# Altium PCB uTCA_MCH_PCB3.pcbdoc (part 7 of 8)
Units mm, origin at the board's own origin, x right, y up, seen from the top; angles counter-clockwise.
Board outline 182.75 x 75.8 mm, 10 copper layers (Top Layer, GND1, MidLayer1, PWR1, Mid-Layer 2, GND2, PWR2, Mid-Layer 3, GND3, Bottom Layer), stack 1.568 mm thick; 778 components, 977 nets, 4756 pads, 1214 vias.
Unrouted connection lines stored in the file: 1790.
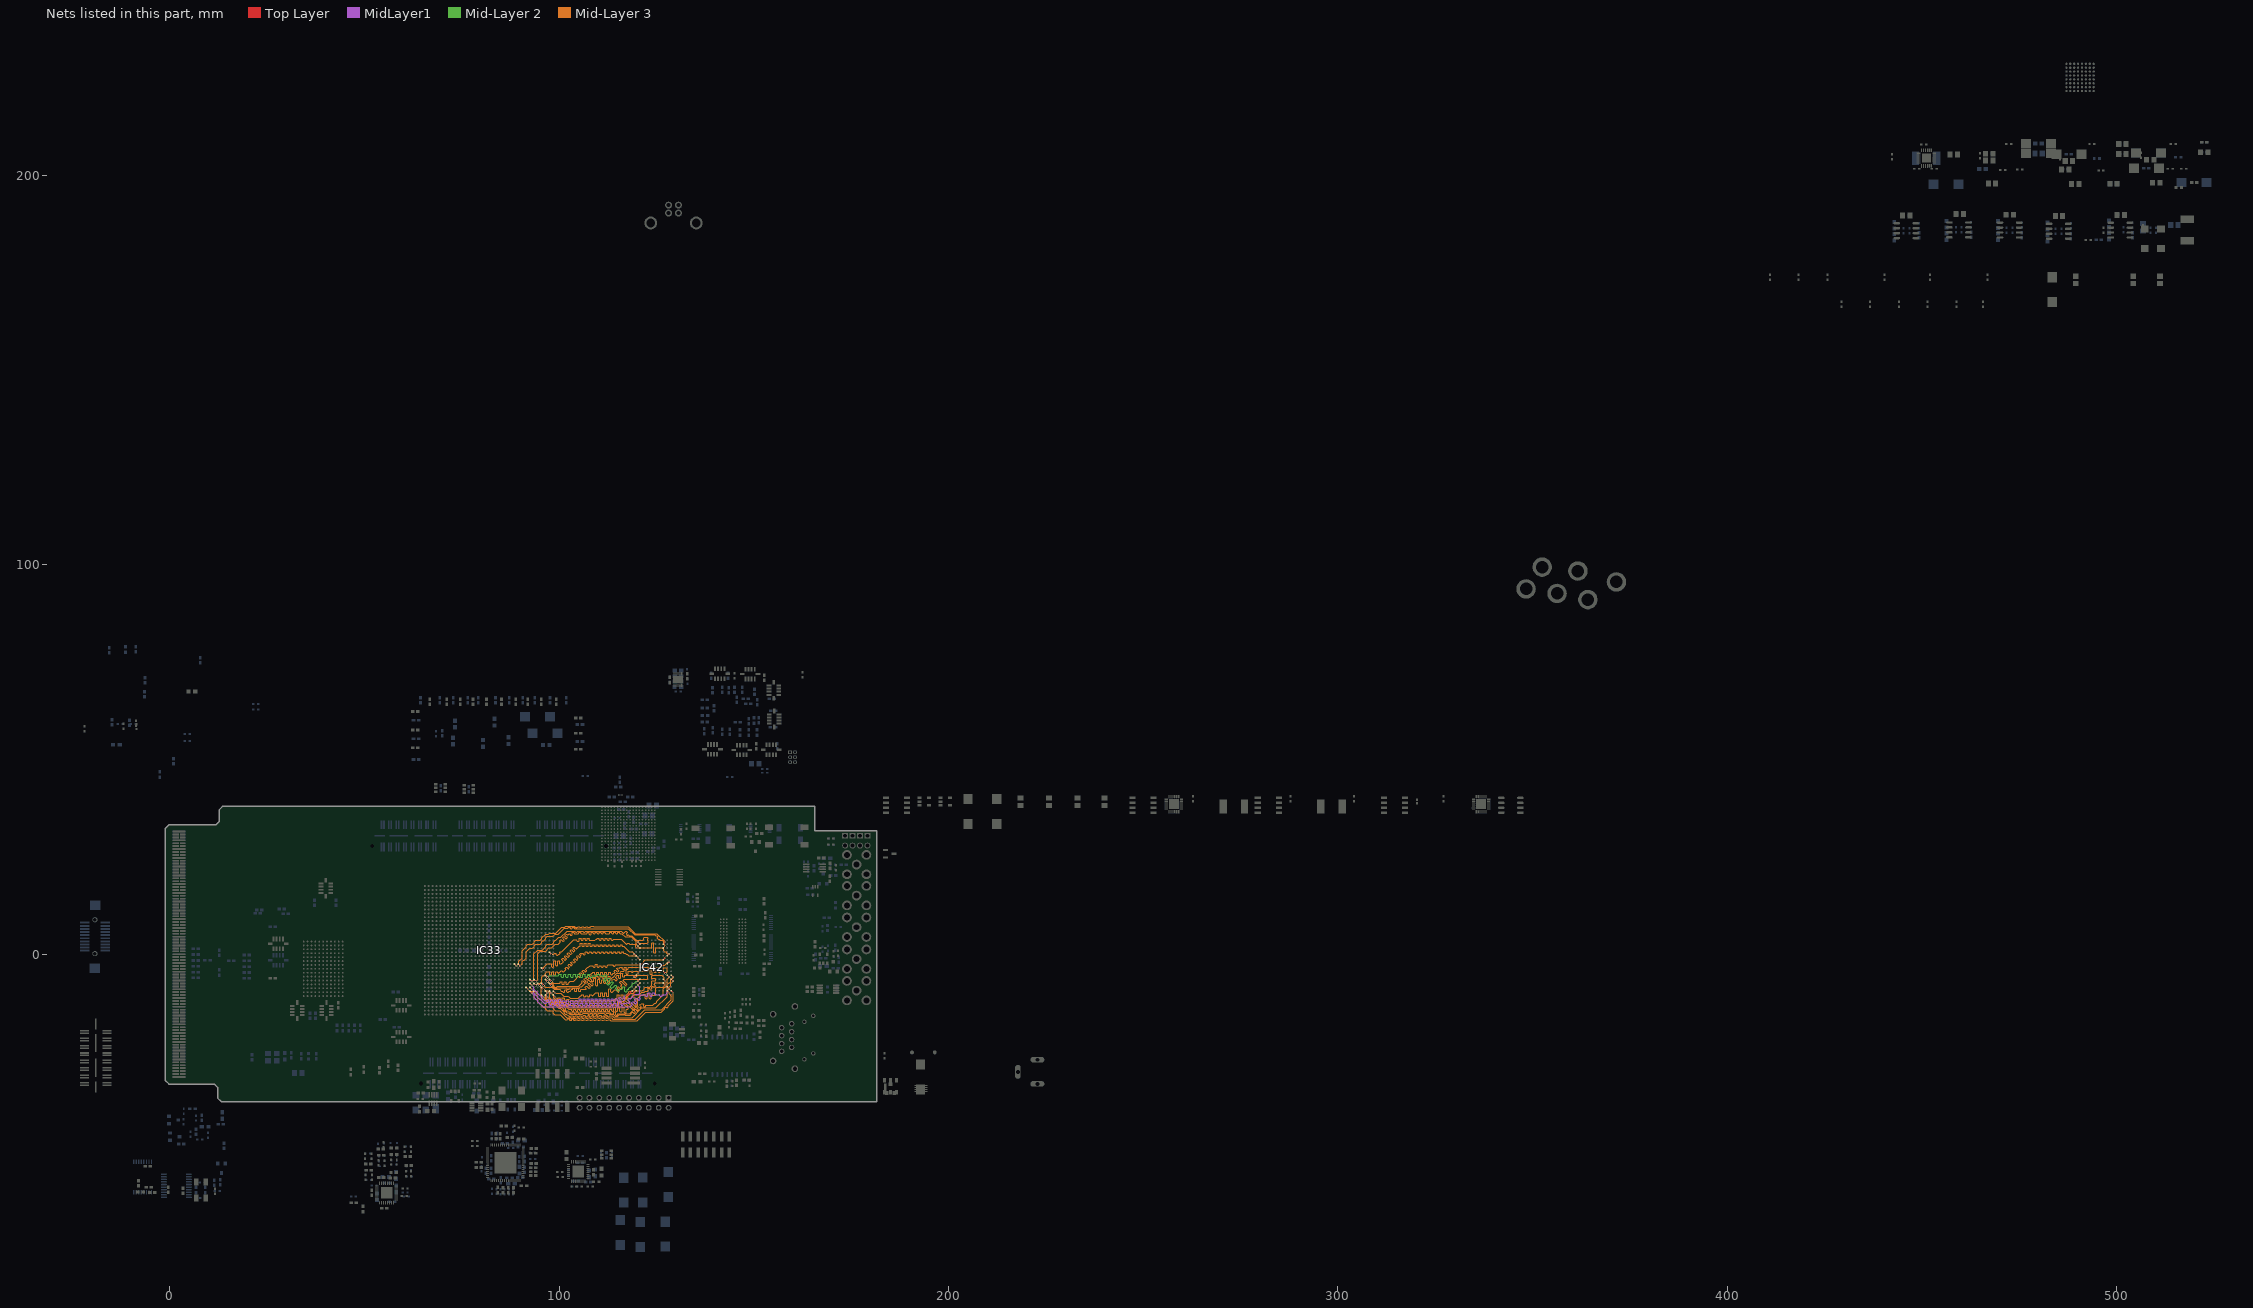
[diagram p15: the nets of this part, all layers, seen from the top]

## Via types
v1: diameter 0.5, hole 0.2, Top Layer to Bottom Layer, 1149 vias
v2: diameter 0.508, hole 0.254, Top Layer to Bottom Layer, 32 vias
v3: diameter 0.66, hole 0.33, Top Layer to Bottom Layer, tented top, 29 vias
v4: diameter 0.5, hole 0.2, Top Layer to Bottom Layer, tented top, 4 vias

## Nets (pads, with @x,y where several pads share a name; then routed paths per layer and width w, separated by ;. In a path a pad name is that pad's centre, name@x,y a point inside that pad or via, vN(x,y) a via of type N, cw(c..) or ccw(c..) an arc to the next point about the centre after c; other vN are vias at no path point) (continued)
Q1_Q7: IC33.A29 IC42.C10 | length 48
  Top Layer w0.175: IC33.A29@98.5,-10.5 v1(99,-11) ; v1(119.3,-8.95) 119.25,-8.9 IC42.C10@119.75,-8.4
  Mid-Layer 3 w0.109: v1(99,-11) 99.45,-11.45 99.605,-11.45 99.708,-11.347 99.708,-11.287 99.811,-11.184 100.12,-11.184 100.223,-11.287 100.223,-11.847 100.326,-11.95 100.635,-11.95 100.738,-11.847 100.738,-11.321 100.842,-11.218 101.151,-11.218 101.254,-11.321 101.254,-11.347 101.357,-11.45 101.357,-11.557 101.65,-11.85 101.908,-11.85 102.012,-11.747 102.012,-11.658 102.115,-11.555 102.424,-11.555 102.527,-11.658 102.527,-12.747 102.63,-12.85 102.939,-12.85 103.042,-12.747 103.042,-11.953 103.145,-11.85 103.52,-11.85 103.623,-11.953 103.623,-12.647 103.726,-12.75 104.035,-12.75 104.138,-12.647 104.138,-11.953 104.242,-11.85 104.551,-11.85 104.654,-11.953 104.654,-12.647 104.757,-12.75 105.066,-12.75 105.169,-12.647 105.169,-11.953 105.272,-11.85 105.582,-11.85 105.685,-11.953 105.685,-12.647 105.788,-12.75 106.097,-12.75 106.2,-12.647 106.2,-11.953 106.303,-11.85 106.612,-11.85 106.715,-11.953 106.715,-12.647 106.819,-12.75 107.128,-12.75 107.231,-12.647 107.231,-11.953 107.334,-11.85 107.643,-11.85 107.746,-11.953 107.746,-12.647 107.849,-12.75 108.159,-12.75 108.262,-12.647 108.262,-11.953 108.365,-11.85 108.674,-11.85 108.777,-11.953 108.777,-12.647 108.88,-12.75 109.189,-12.75 109.292,-12.647 109.292,-11.953 109.396,-11.85 109.705,-11.85 109.808,-11.953 109.808,-12.647 109.911,-12.75 110.22,-12.75 110.323,-12.647 110.323,-11.953 110.426,-11.85 110.736,-11.85 110.839,-11.953 110.839,-12.647 110.942,-12.75 111.251,-12.75 111.354,-12.647 111.354,-11.953 111.457,-11.85 111.766,-11.85 111.869,-11.953 111.869,-12.647 111.973,-12.75 112.282,-12.75 112.385,-12.647 112.385,-11.953 112.488,-11.85 112.797,-11.85 112.9,-11.953 112.9,-12.647 113.003,-12.75 113.313,-12.75 113.416,-12.647 113.416,-11.953 113.519,-11.85 114.043,-11.85 114.046,-11.854 114.6,-11.3 114.755,-11.3 114.858,-11.197 114.858,-10.503 114.961,-10.4 115.27,-10.4 115.373,-10.503 115.373,-12.097 115.476,-12.2 115.785,-12.2 115.888,-12.097 115.888,-10.503 115.992,-10.4 116.301,-10.4 116.404,-10.503 116.404,-11.254 116.45,-11.3 116.85,-11.3 117.4,-10.75 117.4,-10.45 117.9,-9.95 117.9,-9.65 118.1,-9.45 118.8,-9.45 v1@119.3,-8.95
Q1_Q8: IC33.G26 IC42.B11 | length 48.1
  Top Layer w0.175: IC33.G26@92.5,-7.5 v1(93,-8) ; v1(116.95,-10.55) 117.6,-10.55 IC42.B11@118.75,-9.4
  MidLayer1 w0.109: v1(93,-8) 93.43,-8.43 93.43,-9.037 93.963,-9.571 94.178,-9.571 94.571,-9.963 94.571,-10.178 94.963,-10.571 95.178,-10.571 95.571,-10.963 95.571,-11.178 96.293,-11.9 96.755,-11.9 96.858,-11.797 96.858,-11.767 96.961,-11.663 97.27,-11.663 97.373,-11.767 97.373,-12.063 97.476,-12.166 97.785,-12.166 97.888,-12.063 97.888,-11.767 97.992,-11.663 98.301,-11.663 98.404,-11.767 98.404,-12.063 98.507,-12.166 98.816,-12.166 98.919,-12.063 98.919,-11.767 99.022,-11.663 99.332,-11.663 99.435,-11.767 99.435,-12.063 99.538,-12.166 99.847,-12.166 99.95,-12.063 99.95,-11.67 100.053,-11.567 100.362,-11.567 100.465,-11.67 100.465,-12.063 100.569,-12.166 100.878,-12.166 100.981,-12.063 100.981,-12.003 101.084,-11.9 101.393,-11.9 101.496,-12.003 101.496,-12.063 101.599,-12.166 101.909,-12.166 102.012,-12.063 102.012,-12.003 102.115,-11.9 102.424,-11.9 102.527,-12.003 102.527,-12.063 102.63,-12.166 102.939,-12.166 103.042,-12.063 103.042,-12.003 103.146,-11.9 103.455,-11.9 103.558,-12.003 103.558,-12.063 103.661,-12.166 103.97,-12.166 104.073,-12.063 104.073,-12.003 104.176,-11.9 104.486,-11.9 104.589,-12.003 104.589,-12.063 104.692,-12.166 105.001,-12.166 105.104,-12.063 105.104,-11.537 105.207,-11.434 105.516,-11.434 105.619,-11.537 105.619,-12.063 105.723,-12.166 106.032,-12.166 106.135,-12.063 106.135,-11.537 106.238,-11.434 106.547,-11.434 106.65,-11.537 106.65,-12.063 106.753,-12.166 107.063,-12.166 107.166,-12.063 107.166,-11.537 107.269,-11.434 107.578,-11.434 107.681,-11.537 107.681,-12.063 107.784,-12.166 108.093,-12.166 108.196,-12.063 108.196,-11.537 108.3,-11.434 108.609,-11.434 108.712,-11.537 108.712,-12.063 108.815,-12.166 109.124,-12.166 109.227,-12.063 109.227,-11.537 109.33,-11.434 109.64,-11.434 109.743,-11.537 109.743,-12.063 109.846,-12.166 110.155,-12.166 110.258,-12.063 110.258,-11.537 110.361,-11.434 110.67,-11.434 110.773,-11.537 110.773,-12.063 110.877,-12.166 111.186,-12.166 111.289,-12.063 111.289,-11.537 111.392,-11.434 111.701,-11.434 111.804,-11.537 111.804,-12.063 111.907,-12.166 112.217,-12.166 112.32,-12.063 112.32,-11.537 112.423,-11.434 112.732,-11.434 112.835,-11.537 112.835,-12.063 112.938,-12.166 113.247,-12.166 113.35,-12.063 113.35,-11.537 113.454,-11.434 113.763,-11.434 113.866,-11.537 113.866,-12.063 113.969,-12.166 114.278,-12.166 114.381,-12.063 114.381,-11.537 114.484,-11.434 114.794,-11.434 114.897,-11.537 114.897,-11.797 115,-11.9 115.55,-11.9 115.659,-11.791 115.659,-11.645 115.371,-11.356 115.371,-11.21 115.589,-10.992 115.735,-10.992 116.097,-11.353 116.519,-11.775 116.665,-11.775 116.883,-11.557 116.883,-11.411 116.534,-11.062 116.534,-10.916 v1@116.95,-10.5
Q1_Q9: IC33.G25 IC42.P9 | length 48.3
  Top Layer w0.175: IC33.G25@92.5,-6.5 v1(93,-7) ; v1(120.25,3.1) IC42.P9@120.75,2.6
  Mid-Layer 3 w0.109: v1(93,-7) 93.5,-6.5 93.5,0.107 94.443,1.05 95.657,1.05 96.571,1.963 96.571,2.178 96.963,2.571 98.178,2.571 98.571,2.963 98.571,3.178 98.963,3.571 99.178,3.571 99.957,4.35 100.45,4.35 102.018,5.918 104.024,5.918 104.127,5.815 104.127,5.721 104.23,5.618 104.539,5.618 104.642,5.721 104.642,5.815 104.745,5.918 106.124,5.918 106.227,5.815 106.227,5.721 106.33,5.618 106.639,5.618 106.742,5.721 106.742,5.815 106.845,5.918 115.932,5.918 116.45,5.4 116.628,5.4 117.103,5.875 117.249,5.875 117.468,5.656 117.468,5.511 117.189,5.232 117.189,5.086 117.408,4.868 117.554,4.868 117.62,4.934 117.766,4.934 118,4.7 118.65,4.7 119.75,3.6 121.45,3.6 121.68,3.829 121.68,4.129 121.846,4.296 122.654,4.296 122.75,4.2 122.75,3.95 122.65,3.85 122.65,3.6 122.8,3.45 122.8,2.9 122.55,2.65 120.65,2.65 120.25,3.05 v1(120.25,3.1)
Q1_Q10: IC33.F25 IC42.N9 | length 48.2
  Top Layer w0.175: IC33.F25@93.5,-6.5 v1(94,-7) ; v1(120.25,2.1) IC42.N9@120.75,1.6
  Mid-Layer 3 w0.109: v1(94,-7) 94.5,-6.5 94.5,0.107 95.143,0.75 96.5,0.75 97.37,1.62 98.128,1.62 99.007,2.5 99.75,2.5 100.309,3.059 100.309,3.205 100.172,3.342 100.172,3.488 100.391,3.707 100.537,3.707 100.747,3.497 100.957,3.287 101.102,3.287 101.321,3.505 101.321,3.651 101.111,3.861 100.901,4.071 100.901,4.217 101.12,4.435 101.266,4.435 101.476,4.226 101.685,4.016 101.831,4.016 102.05,4.234 102.05,4.38 101.63,4.8 101.63,4.946 101.849,5.164 101.994,5.164 102.132,5.027 102.277,5.027 102.534,5.284 102.689,5.284 102.792,5.181 102.792,4.987 102.895,4.884 103.204,4.884 103.307,4.987 103.307,5.581 103.41,5.684 103.719,5.684 103.822,5.581 103.822,5.387 103.926,5.284 104.958,5.284 105.062,5.387 105.062,5.481 105.165,5.584 105.474,5.584 105.577,5.481 105.577,5.387 105.68,5.284 107.085,5.284 107.188,5.387 107.188,5.581 107.291,5.684 107.601,5.684 107.704,5.581 107.704,5.085 107.807,4.982 108.116,4.982 108.219,5.085 108.219,5.581 108.322,5.684 108.631,5.684 108.735,5.581 108.735,5.387 108.838,5.284 109.147,5.284 109.25,5.387 109.25,5.581 109.353,5.684 109.662,5.684 109.765,5.581 109.765,5.387 109.868,5.284 110.178,5.284 110.281,5.387 110.281,5.581 110.384,5.684 110.693,5.684 110.796,5.581 110.796,5.387 110.899,5.284 111.208,5.284 111.312,5.387 111.312,5.581 111.415,5.684 111.724,5.684 111.827,5.581 111.827,5.387 111.93,5.284 112.905,5.284 113.008,5.387 113.008,5.581 113.111,5.684 113.42,5.684 113.523,5.581 113.523,5.387 113.626,5.284 113.935,5.284 114.038,5.387 114.038,5.581 114.142,5.684 114.451,5.684 114.554,5.581 114.554,5.387 114.657,5.284 114.966,5.284 115.069,5.387 115.069,5.581 115.172,5.684 115.482,5.684 115.585,5.581 115.585,5.387 115.688,5.284 116.133,5.284 116.967,4.45 118.507,4.45 119.75,3.207 119.75,2.6 v1(120.25,2.1)
Q1_Q11: IC33.D22 IC42.L10 | length 48.2
  Top Layer w0.175: IC33.D22@95.5,-3.5 v1(96,-4) ; v1(119.25,0.1) IC42.L10@119.75,-0.4
  Mid-Layer 3 w0.109: v1(96,-4) 96,-3.393 96.893,-2.5 98.02,-2.5 98.123,-2.603 98.123,-3.197 98.226,-3.3 98.535,-3.3 98.638,-3.197 98.638,-1.803 98.742,-1.7 99.051,-1.7 99.154,-1.803 99.154,-2.834 99.257,-2.937 99.566,-2.937 99.669,-2.834 99.669,-1.803 99.772,-1.7 100.082,-1.7 100.185,-1.803 100.185,-2.397 100.288,-2.5 100.6,-2.5 101.074,-2.026 101.074,-1.88 100.654,-1.461 100.654,-1.315 100.873,-1.096 101.018,-1.096 101.438,-1.516 101.584,-1.516 101.803,-1.297 101.803,-1.152 101.383,-0.732 101.383,-0.586 101.601,-0.367 101.747,-0.367 102.167,-0.787 102.313,-0.787 102.532,-0.568 102.532,-0.423 102.112,-0.003 102.112,0.143 102.33,0.362 102.476,0.362 102.896,-0.058 103.042,-0.058 103.26,0.16 103.26,0.306 102.841,0.726 102.841,0.872 103.059,1.091 103.205,1.091 103.625,0.671 103.771,0.671 103.989,0.889 103.989,1.035 103.569,1.455 103.569,1.601 103.788,1.819 103.934,1.819 104.354,1.4 104.5,1.4 105.1,2 105.255,2 105.358,2.103 105.358,2.697 105.461,2.8 105.77,2.8 105.873,2.697 105.873,2.103 105.976,2 106.285,2 106.388,2.103 106.388,2.697 106.492,2.8 106.801,2.8 106.904,2.697 106.904,2.103 107.007,2 107.316,2 107.419,2.103 107.419,2.697 107.522,2.8 107.832,2.8 107.935,2.697 107.935,2.103 108.038,2 108.347,2 108.45,2.103 108.45,2.263 108.553,2.366 108.862,2.366 108.965,2.263 108.965,2.103 109.069,2 109.378,2 109.481,2.103 109.481,2.263 109.584,2.366 109.893,2.366 109.996,2.263 109.996,2.103 110.099,2 110.409,2 110.512,2.103 110.512,2.263 110.615,2.366 110.924,2.366 111.027,2.263 111.027,2.103 111.13,2 111.439,2 111.542,2.103 111.542,2.263 111.646,2.366 111.955,2.366 112.058,2.263 112.058,2.103 112.161,2 112.47,2 112.573,2.103 112.573,2.263 112.676,2.366 112.986,2.366 113.089,2.263 113.089,2.103 113.192,2 113.501,2 113.604,2.103 113.604,2.263 113.707,2.366 114.016,2.366 114.119,2.263 114.119,2.103 114.223,2 114.532,2 114.635,2.103 114.635,2.263 114.738,2.366 115.047,2.366 115.15,2.263 115.15,2.103 115.253,2 115.563,2 115.666,2.103 115.666,2.263 115.769,2.366 116.078,2.366 116.181,2.263 116.181,2.103 116.284,2 116.65,2 118.05,0.6 118.75,0.6 v1(119.25,0.1)
Q1_Q12: IC33.F26 IC42.K9 | length 48
  Top Layer w0.175: IC33.F26@93.5,-7.5 v1(94,-8) ; v1(120.25,-0.9) IC42.K9@120.75,-1.4
  Mid-Layer 3 w0.109: v1(94,-8) 94.5,-7.5 95.107,-7.5 95.5,-7.107 95.5,-5.893 95.843,-5.55 96.057,-5.55 96.43,-5.178 96.43,-4.963 96.843,-4.55 97.513,-4.55 97.616,-4.653 97.616,-5.233 97.719,-5.337 98.028,-5.337 98.131,-5.233 98.131,-4.653 98.234,-4.55 98.543,-4.55 98.647,-4.653 98.647,-5.233 98.75,-5.337 99.059,-5.337 99.162,-5.233 99.162,-4.653 99.265,-4.55 99.574,-4.55 99.677,-4.653 99.677,-4.763 99.78,-4.866 99.934,-4.866 100.5,-4.3 100.7,-4.3 100.95,-4.55 101.15,-4.55 101.709,-3.991 101.709,-3.845 101.572,-3.708 101.572,-3.562 101.791,-3.343 101.937,-3.343 102.288,-3.695 102.434,-3.695 102.653,-3.476 102.653,-3.331 102.301,-2.979 102.301,-2.833 102.52,-2.615 102.666,-2.615 103.017,-2.966 103.163,-2.966 103.382,-2.747 103.382,-2.602 103.03,-2.25 103.03,-2.104 103.249,-1.886 103.394,-1.886 103.746,-2.237 103.892,-2.237 104.111,-2.019 104.111,-1.873 103.759,-1.521 103.759,-1.375 103.978,-1.157 104.123,-1.157 104.475,-1.508 104.621,-1.508 104.839,-1.29 104.839,-1.144 104.488,-0.792 104.488,-0.647 104.706,-0.428 104.852,-0.428 105.214,-0.79 105.36,-0.79 105.579,-0.571 105.579,-0.425 105.302,-0.148 105.302,-0.003 105.52,0.216 105.666,0.216 105.718,0.164 105.864,0.164 105.95,0.25 106.105,0.25 106.208,0.147 106.208,-0.047 106.311,-0.15 106.62,-0.15 106.723,-0.047 106.723,0.547 106.826,0.65 107.135,0.65 107.238,0.547 107.238,0.353 107.342,0.25 107.651,0.25 107.754,0.353 107.754,0.547 107.857,0.65 108.166,0.65 108.269,0.547 108.269,0.353 108.372,0.25 108.682,0.25 108.785,0.353 108.785,0.547 108.888,0.65 109.197,0.65 109.3,0.547 109.3,0.353 109.403,0.25 109.712,0.25 109.815,0.353 109.815,0.547 109.919,0.65 110.228,0.65 110.331,0.547 110.331,0.353 110.434,0.25 110.743,0.25 110.846,0.353 110.846,0.547 110.949,0.65 111.259,0.65 111.362,0.547 111.362,0.353 111.465,0.25 111.774,0.25 111.877,0.353 111.877,0.547 111.98,0.65 112.289,0.65 112.392,0.547 112.392,0.353 112.496,0.25 112.805,0.25 112.908,0.353 112.908,0.547 113.011,0.65 113.32,0.65 113.423,0.547 113.423,0.353 113.526,0.25 113.836,0.25 113.939,0.353 113.939,0.547 114.042,0.65 114.351,0.65 114.454,0.547 114.454,0.353 114.557,0.25 114.866,0.25 114.969,0.353 114.969,0.547 115.073,0.65 115.382,0.65 115.485,0.547 115.485,0.353 115.588,0.25 115.897,0.25 116,0.353 116,0.547 116.103,0.65 116.413,0.65 116.516,0.547 116.516,0.353 116.619,0.25 117,0.25 117.25,0 117.45,0 117.65,-0.2 117.85,-0.4 119.75,-0.4 v1(120.25,-0.9)
Q1_Q13: IC33.D26 IC42.G9 | length 48.1
  Top Layer w0.175: IC33.D26@95.5,-7.5 v1(96,-8) ; v1(120.25,-4.9) IC42.G9@120.75,-4.4
  Mid-Layer 3 w0.109: v1(96,-8) 96.45,-8.45 98.119,-8.45 98.719,-9.05 100.15,-9.05 100.58,-9.48 100.843,-9.48 100.946,-9.583 100.946,-9.676 101.049,-9.78 101.358,-9.78 101.462,-9.676 101.462,-9.283 101.565,-9.18 101.874,-9.18 101.977,-9.283 101.977,-9.676 102.08,-9.78 102.389,-9.78 102.492,-9.676 102.492,-9.583 102.595,-9.48 102.82,-9.48 103.25,-9.05 103.405,-9.05 103.508,-8.947 103.508,-8.887 103.611,-8.784 103.92,-8.784 104.023,-8.887 104.023,-9.447 104.126,-9.55 104.435,-9.55 104.538,-9.447 104.538,-8.887 104.642,-8.784 104.951,-8.784 105.054,-8.887 105.054,-9.447 105.157,-9.55 105.466,-9.55 105.569,-9.447 105.569,-9.153 105.672,-9.05 106.8,-9.05 106.909,-8.941 106.909,-8.795 106.702,-8.587 106.702,-8.441 106.92,-8.223 107.066,-8.223 107.627,-8.784 107.773,-8.784 107.992,-8.565 107.992,-8.42 107.43,-7.858 107.43,-7.712 107.649,-7.494 107.795,-7.494 108.356,-8.055 108.502,-8.055 108.721,-7.836 108.721,-7.621 108.55,-7.45 108.55,-7.1 108.65,-7 108.805,-7 108.908,-6.897 108.908,-6.237 109.011,-6.134 109.32,-6.134 109.423,-6.237 109.423,-7.997 109.526,-8.1 109.835,-8.1 109.938,-7.997 109.938,-6.537 110.042,-6.434 110.351,-6.434 110.454,-6.537 110.454,-7.046 110.4,-7.1 110.4,-7.297 110.503,-7.4 110.812,-7.4 110.915,-7.297 110.915,-6.703 111.018,-6.6 111.328,-6.6 111.431,-6.703 111.431,-7.297 111.534,-7.4 111.843,-7.4 111.946,-7.297 111.946,-6.703 112.049,-6.6 112.358,-6.6 112.462,-6.703 112.462,-7.297 112.565,-7.4 112.874,-7.4 112.977,-7.297 112.977,-6.703 113.08,-6.6 113.75,-6.6 113.966,-6.384 114.112,-6.384 114.532,-6.804 114.677,-6.804 114.896,-6.585 114.896,-6.439 114.476,-6.02 114.476,-5.874 114.95,-5.4 115.143,-5.4 115.246,-5.503 115.246,-6.097 115.349,-6.2 115.658,-6.2 115.762,-6.097 115.762,-4.969 115.865,-4.866 116.174,-4.866 116.277,-4.969 116.277,-5.727 116.38,-5.83 116.689,-5.83 116.792,-5.727 116.792,-5.503 116.895,-5.4 119.75,-5.4 v1(120.25,-4.9)
Q1_Q14: IC33.A28 IC42.F10 | length 48.2
  Top Layer w0.175: IC33.A28@98.5,-9.5 v1(99,-10) ; v1(119.25,-5.9) IC42.F10@119.75,-5.4
  Mid-Layer 3 w0.109: v1(99,-10) 100.4,-10 101.15,-10.75 102.35,-10.75 102.575,-10.975 102.575,-10.994 102.831,-11.25 104.9,-11.25 105.5,-10.65 105.655,-10.65 105.758,-10.547 105.758,-10.453 105.861,-10.35 106.17,-10.35 106.273,-10.453 106.273,-10.847 106.376,-10.95 106.685,-10.95 106.788,-10.847 106.788,-10.753 106.892,-10.65 107.201,-10.65 107.304,-10.753 107.304,-10.847 107.407,-10.95 107.716,-10.95 107.819,-10.847 107.819,-10.453 107.922,-10.35 108.232,-10.35 108.335,-10.453 108.335,-10.547 108.438,-10.65 108.6,-10.65 109.4,-9.85 110.07,-9.85 110.173,-9.953 110.173,-10.747 110.276,-10.85 110.585,-10.85 110.688,-10.747 110.688,-9.953 110.792,-9.85 111.101,-9.85 111.204,-9.953 111.204,-10.747 111.307,-10.85 111.616,-10.85 111.719,-10.747 111.719,-9.953 111.822,-9.85 112.132,-9.85 112.235,-9.953 112.235,-10.747 112.338,-10.85 112.647,-10.85 112.75,-10.747 112.75,-8.953 112.853,-8.85 113.162,-8.85 113.265,-8.953 113.265,-9.615 113.378,-9.728 113.7,-9.728 114.338,-9.09 114.483,-9.09 115.119,-9.725 115.265,-9.725 115.483,-9.507 115.483,-9.361 114.865,-8.743 114.865,-8.597 115.084,-8.378 115.23,-8.378 115.848,-8.997 115.993,-8.997 116.212,-8.778 116.212,-8.632 115.863,-8.283 115.863,-8.137 116.059,-7.941 116.059,-7.795 115.569,-7.304 115.569,-7.158 115.787,-6.94 115.933,-6.94 117.06,-8.067 117.206,-8.067 117.425,-7.848 117.425,-7.702 116.509,-6.787 116.509,-6.641 116.75,-6.4 122.55,-6.4 122.7,-6.25 122.7,-5.55 122.55,-5.4 120.143,-5.4 119.75,-5.793 119.75,-5.8 119.65,-5.9 v1(119.25,-5.9)
Q1_Q15: IC33.C24 IC42.E9 | length 48.1
  Top Layer w0.175: IC33.C24@96.5,-5.5 v1(97,-6) ; v1(120.25,-6.9) IC42.E9@120.75,-6.4
  Mid-Layer 2 w0.109: v1(97,-6) 97.5,-5.5 99.785,-5.5 99.908,-5.377 99.908,-5.223 100.031,-5.1 100.4,-5.1 100.523,-5.223 100.523,-5.777 100.646,-5.9 101.015,-5.9 101.138,-5.777 101.138,-5.223 101.262,-5.1 101.631,-5.1 101.754,-5.223 101.754,-5.777 101.877,-5.9 102.246,-5.9 102.369,-5.777 102.369,-5.223 102.492,-5.1 102.862,-5.1 102.985,-5.223 102.985,-5.777 103.108,-5.9 103.477,-5.9 103.6,-5.777 103.6,-5.223 103.723,-5.1 104.092,-5.1 104.215,-5.223 104.215,-5.777 104.339,-5.9 104.708,-5.9 104.831,-5.777 104.831,-5.223 104.954,-5.1 105.323,-5.1 105.446,-5.223 105.446,-5.777 105.569,-5.9 105.939,-5.9 106.062,-5.777 106.062,-5.223 106.185,-5.1 106.554,-5.1 106.677,-5.223 106.677,-5.777 106.8,-5.9 107.169,-5.9 107.292,-5.777 107.292,-5.223 107.416,-5.1 107.785,-5.1 107.908,-5.223 107.908,-5.777 108.031,-5.9 108.4,-5.9 108.523,-5.777 108.523,-5.623 108.646,-5.5 109.685,-5.5 109.808,-5.377 109.808,-5.207 109.931,-5.084 110.3,-5.084 110.423,-5.207 110.423,-5.377 110.546,-5.5 111.15,-5.5 111.281,-5.631 111.455,-5.631 111.776,-5.31 111.95,-5.31 112.211,-5.571 112.211,-5.745 111.803,-6.153 111.395,-6.561 111.395,-6.735 111.656,-6.996 111.83,-6.996 112.238,-6.588 112.646,-6.18 112.82,-6.18 113.081,-6.441 113.081,-6.615 112.673,-7.023 112.265,-7.431 112.265,-7.605 112.526,-7.866 112.7,-7.866 113.108,-7.458 113.516,-7.05 113.69,-7.05 113.951,-7.311 113.951,-7.485 113.543,-7.893 113.135,-8.301 113.135,-8.475 113.396,-8.736 113.571,-8.736 113.978,-8.328 114.386,-7.921 114.56,-7.921 114.822,-8.182 114.822,-8.356 114.501,-8.677 114.501,-8.851 114.65,-9 114.835,-9 114.958,-9.123 114.958,-9.263 115.081,-9.387 115.45,-9.387 115.573,-9.263 115.573,-9.127 115.7,-9 116.135,-9 116.258,-8.877 116.258,-8.523 116.381,-8.4 116.75,-8.4 116.873,-8.523 116.873,-9.477 116.996,-9.6 117.365,-9.6 117.488,-9.477 117.488,-9.123 117.612,-9 117.757,-9 117.82,-8.937 117.82,-8.722 118.072,-8.471 118.287,-8.471 118.82,-7.937 118.82,-7.722 119.072,-7.471 119.287,-7.471 119.857,-6.9 v1(120.25,-6.9)
Q1_Q16: IC33.G27 IC42.D9 | length 48.1
  Top Layer w0.175: IC33.G27@92.5,-8.5 v1(93,-9) ; v1(120.25,-7.9) IC42.D9@120.75,-7.4
  MidLayer1 w0.109: v1(93,-9) 93.43,-9.43 93.43,-10.037 93.963,-10.571 94.178,-10.571 94.571,-10.963 94.571,-11.178 94.963,-11.571 95.178,-11.571 96.157,-12.55 96.702,-12.55 96.931,-12.321 97.3,-12.321 97.423,-12.444 97.423,-12.926 97.546,-13.049 97.915,-13.049 98.038,-12.926 98.038,-12.673 98.162,-12.55 98.531,-12.55 98.654,-12.673 98.654,-12.927 98.777,-13.05 99.146,-13.05 99.269,-12.927 99.269,-12.673 99.392,-12.55 99.762,-12.55 99.885,-12.673 99.885,-12.927 100.008,-13.05 100.377,-13.05 100.5,-12.927 100.5,-12.673 100.623,-12.55 100.992,-12.55 101.115,-12.673 101.115,-12.927 101.239,-13.05 101.608,-13.05 101.731,-12.927 101.731,-12.673 101.854,-12.55 102.223,-12.55 102.346,-12.673 102.346,-12.927 102.469,-13.05 102.839,-13.05 102.962,-12.927 102.962,-12.673 103.085,-12.55 103.454,-12.55 103.577,-12.673 103.577,-12.927 103.7,-13.05 104.069,-13.05 104.192,-12.927 104.192,-12.673 104.316,-12.55 104.685,-12.55 104.808,-12.673 104.808,-12.927 104.931,-13.05 105.3,-13.05 105.423,-12.927 105.423,-12.673 105.546,-12.55 105.916,-12.55 106.039,-12.673 106.039,-12.927 106.162,-13.05 106.531,-13.05 106.654,-12.927 106.654,-12.673 106.777,-12.55 107.146,-12.55 107.269,-12.673 107.269,-12.927 107.393,-13.05 107.762,-13.05 107.885,-12.927 107.885,-12.673 108.008,-12.55 108.377,-12.55 108.5,-12.673 108.5,-12.927 108.623,-13.05 108.993,-13.05 109.116,-12.927 109.116,-12.673 109.239,-12.55 109.608,-12.55 109.731,-12.673 109.731,-12.927 109.854,-13.05 110.223,-13.05 110.346,-12.927 110.346,-12.673 110.47,-12.55 110.839,-12.55 110.962,-12.673 110.962,-12.927 111.085,-13.05 111.454,-13.05 111.577,-12.927 111.577,-12.673 111.7,-12.55 112.07,-12.55 112.193,-12.673 112.193,-12.927 112.316,-13.05 112.685,-13.05 112.808,-12.927 112.808,-12.673 112.931,-12.55 113.3,-12.55 113.423,-12.673 113.423,-12.927 113.547,-13.05 113.916,-13.05 114.039,-12.927 114.039,-12.673 114.162,-12.55 114.531,-12.55 114.654,-12.673 114.654,-12.927 114.777,-13.05 115.147,-13.05 115.27,-12.927 115.27,-12.257 115.393,-12.134 115.762,-12.134 115.885,-12.257 115.885,-12.927 116.008,-13.05 116.377,-13.05 116.5,-12.927 116.5,-12.673 116.624,-12.55 117.25,-12.55 117.381,-12.419 117.555,-12.419 117.734,-12.599 117.908,-12.599 118.169,-12.338 118.169,-12.164 117.903,-11.897 117.795,-11.789 117.795,-11.615 118.056,-11.354 118.061,-11.354 ; 118.062,-11.355 118.23,-11.355 118.251,-11.375 118.425,-11.375 119.47,-10.33 120.428,-10.33 120.75,-10.007 120.75,-8.541 120.25,-8.041 v1(120.25,-7.9)
Q1_Q17: IC33.C29 IC42.B10 | length 48.3
  Top Layer w0.175: IC33.C29@96.5,-10.5 97,-11 v1(97.05,-11) ; v1(119.3,-11.2) 119.3,-9.85 IC42.B10@119.75,-9.4
  Mid-Layer 3 w0.109: v1(97.05,-11) 98.284,-12.234 99.434,-12.234 100.234,-13.034 101.384,-13.034 102.45,-14.1 103.12,-14.1 103.223,-14.203 103.223,-14.497 103.326,-14.6 103.635,-14.6 103.738,-14.497 103.738,-14.203 103.842,-14.1 104.151,-14.1 104.254,-14.203 104.254,-14.497 104.357,-14.6 104.666,-14.6 104.769,-14.497 104.769,-14.203 104.872,-14.1 105.182,-14.1 105.285,-14.203 105.285,-14.497 105.388,-14.6 105.697,-14.6 105.8,-14.497 105.8,-14.203 105.903,-14.1 106.212,-14.1 106.315,-14.203 106.315,-14.497 106.419,-14.6 106.728,-14.6 106.831,-14.497 106.831,-14.203 106.934,-14.1 107.243,-14.1 107.346,-14.203 107.346,-14.497 107.449,-14.6 107.759,-14.6 107.862,-14.497 107.862,-14.203 107.965,-14.1 108.274,-14.1 108.377,-14.203 108.377,-14.497 108.48,-14.6 108.789,-14.6 108.892,-14.497 108.892,-14.203 108.996,-14.1 109.305,-14.1 109.408,-14.203 109.408,-14.497 109.511,-14.6 109.82,-14.6 109.923,-14.497 109.923,-14.203 110.026,-14.1 110.336,-14.1 110.439,-14.203 110.439,-14.497 110.542,-14.6 110.851,-14.6 110.954,-14.497 110.954,-14.203 111.057,-14.1 111.366,-14.1 111.469,-14.203 111.469,-14.497 111.573,-14.6 111.882,-14.6 111.985,-14.497 111.985,-14.203 112.088,-14.1 112.397,-14.1 112.5,-14.203 112.5,-14.497 112.603,-14.6 112.913,-14.6 113.016,-14.497 113.016,-14.203 113.119,-14.1 113.428,-14.1 113.531,-14.203 113.531,-14.497 113.634,-14.6 113.943,-14.6 114.046,-14.497 114.046,-13.703 114.15,-13.6 114.459,-13.6 114.562,-13.703 114.562,-14.497 114.665,-14.6 114.974,-14.6 115.077,-14.497 115.077,-13.887 115.18,-13.784 115.49,-13.784 115.593,-13.887 115.593,-14.693 115.7,-14.8 116.108,-14.8 116.258,-14.65 116.258,-13.723 116.361,-13.62 116.67,-13.62 116.773,-13.723 116.773,-14.897 116.876,-15 117.185,-15 117.288,-14.897 117.288,-14.203 117.392,-14.1 117.6,-14.1 117.709,-13.991 117.709,-13.845 117.491,-13.626 117.491,-13.48 117.709,-13.262 117.855,-13.262 118.71,-14.117 118.856,-14.117 119.075,-13.898 119.075,-13.752 118.123,-12.801 118.123,-12.655 118.342,-12.437 118.488,-12.437 119.439,-13.388 119.585,-13.388 119.803,-13.169 119.803,-13.024 119.313,-12.533 119.313,-12.287 119.75,-11.85 119.75,-11.65 v1(119.3,-11.2)
Q1_Q18: IC33.H27 IC42.B2 | length 48.3
  Top Layer w0.175: IC33.H27@91.5,-8.5 v1(92,-9) ; IC42.B2@127.75,-9.4 v1(128.25,-9.9)
  Mid-Layer 3 w0.109: v1(92,-9) 92.571,-9.571 94.178,-9.571 94.43,-9.822 94.43,-11.037 94.963,-11.571 95.178,-11.571 96.571,-12.963 96.571,-13.178 96.893,-13.5 98.107,-13.5 98.571,-13.963 98.571,-14.178 98.943,-14.55 100.15,-14.55 101.9,-16.3 103.726,-16.3 103.926,-16.5 104.235,-16.5 104.435,-16.3 104.757,-16.3 104.957,-16.5 105.266,-16.5 105.466,-16.3 105.788,-16.3 105.988,-16.5 106.297,-16.5 106.497,-16.3 106.819,-16.3 107.019,-16.5 107.328,-16.5 107.528,-16.3 107.849,-16.3 108.049,-16.5 108.359,-16.5 108.559,-16.3 108.88,-16.3 109.08,-16.5 109.389,-16.5 109.589,-16.3 109.911,-16.3 110.111,-16.5 110.42,-16.5 110.62,-16.3 110.942,-16.3 111.142,-16.5 111.451,-16.5 111.554,-16.397 111.554,-16.203 111.657,-16.1 111.966,-16.1 112.069,-16.203 112.069,-16.397 112.173,-16.5 112.482,-16.5 112.682,-16.3 113.45,-16.3 113.8,-16.65 119.5,-16.65 121.95,-14.2 126.3,-14.2 128.85,-11.65 128.85,-10.757 128.25,-10.157 v1(128.25,-9.9)
Q1_Q19: IC33.C28 IC42.D3 | length 48.3
  Top Layer w0.175: IC33.C28@96.5,-9.5 v1(97,-10) ; IC42.D3@126.75,-7.4 v1(127.25,-7.9)
  Mid-Layer 3 w0.109: v1(97,-10) 96.62,-10.38 96.62,-11.178 97.91,-12.468 99.318,-12.468 100.118,-13.268 101.05,-13.268 101.74,-13.958 101.74,-14.104 101.603,-14.241 101.603,-14.386 101.821,-14.605 101.967,-14.605 102.104,-14.468 102.25,-14.468 102.616,-14.834 102.771,-14.834 102.874,-14.937 102.874,-15.131 102.977,-15.234 103.286,-15.234 103.389,-15.131 103.389,-14.937 103.492,-14.834 103.801,-14.834 103.904,-14.937 103.904,-15.131 104.008,-15.234 104.317,-15.234 104.42,-15.131 104.42,-14.937 104.523,-14.834 104.832,-14.834 104.935,-14.937 104.935,-15.131 105.038,-15.234 105.348,-15.234 105.451,-15.131 105.451,-14.937 105.554,-14.834 112.834,-14.834 113.234,-15.234 113.955,-15.234 114.058,-15.131 114.058,-14.937 114.161,-14.834 114.47,-14.834 114.573,-14.937 114.573,-15.531 114.676,-15.634 114.985,-15.634 115.088,-15.531 115.088,-15.337 115.192,-15.234 118.116,-15.234 120.2,-13.15 120.2,-11.3 120.95,-10.55 121.505,-10.55 121.608,-10.447 121.608,-10.366 121.711,-10.263 122.02,-10.263 122.123,-10.366 122.123,-11.347 122.226,-11.45 122.535,-11.45 122.638,-11.347 122.638,-10.083 122.742,-9.98 123.051,-9.98 123.154,-10.083 123.154,-11.347 123.257,-11.45 123.566,-11.45 123.669,-11.347 123.669,-10.653 123.772,-10.55 124.5,-10.55 124.75,-10.3 124.75,-8.75 125.029,-8.471 126.68,-8.471 v1(127.25,-7.9)
Q1_Q20: IC33.B28 IC42.E3 | length 48
  Top Layer w0.175: IC33.B28@97.5,-9.5 v1(98,-10) ; IC42.E3@126.75,-6.4 v1(127.25,-6.9)
  Mid-Layer 3 w0.109: v1(98,-10) 98.43,-10.43 98.43,-11.037 99.077,-11.684 99.684,-11.684 100.184,-12.184 100.984,-12.184 101.15,-12.35 101.75,-12.35 101.95,-12.55 101.95,-12.6 102.45,-13.1 103.37,-13.1 103.473,-13.203 103.473,-13.397 103.576,-13.5 103.885,-13.5 103.988,-13.397 103.988,-13.203 104.092,-13.1 104.401,-13.1 104.504,-13.203 104.504,-13.397 104.607,-13.5 104.916,-13.5 105.019,-13.397 105.019,-13.203 105.122,-13.1 105.432,-13.1 105.535,-13.203 105.535,-13.397 105.638,-13.5 105.947,-13.5 106.05,-13.397 106.05,-13.203 106.153,-13.1 106.462,-13.1 106.565,-13.203 106.565,-13.397 106.669,-13.5 106.978,-13.5 107.081,-13.397 107.081,-13.203 107.184,-13.1 107.493,-13.1 107.596,-13.203 107.596,-13.397 107.699,-13.5 108.009,-13.5 108.112,-13.397 108.112,-13.203 108.215,-13.1 108.524,-13.1 108.627,-13.203 108.627,-13.397 108.73,-13.5 109.039,-13.5 109.142,-13.397 109.142,-13.203 109.246,-13.1 109.555,-13.1 109.658,-13.203 109.658,-13.397 109.761,-13.5 110.07,-13.5 110.173,-13.397 110.173,-13.203 110.276,-13.1 110.586,-13.1 110.689,-13.203 110.689,-13.397 110.792,-13.5 111.101,-13.5 111.204,-13.397 111.204,-13.203 111.307,-13.1 111.616,-13.1 111.719,-13.203 111.719,-13.397 111.823,-13.5 112.132,-13.5 112.235,-13.397 112.235,-13.203 112.338,-13.1 112.647,-13.1 112.75,-13.203 112.75,-13.397 112.853,-13.5 113.163,-13.5 113.266,-13.397 113.266,-13.203 113.369,-13.1 113.5,-13.1 114.15,-12.45 114.305,-12.45 114.408,-12.347 114.408,-11.823 114.511,-11.72 114.82,-11.72 114.923,-11.823 114.923,-13.147 115.026,-13.25 115.335,-13.25 115.438,-13.147 115.438,-12.553 115.542,-12.45 116,-12.45 116.916,-11.534 116.947,-11.534 117.634,-10.847 117.634,-10.816 118.45,-10 119,-10 119.6,-9.4 121.357,-9.4 121.82,-8.937 121.82,-8.722 122.093,-8.45 123.307,-8.45 123.8,-7.957 123.8,-6.98 123.903,-6.877 124.697,-6.877 124.8,-6.774 124.8,-6.465 124.697,-6.362 123.903,-6.362 123.8,-6.258 123.8,-5.65 124.05,-5.4 126.357,-5.4 126.82,-5.863 126.82,-6.471 v1(127.25,-6.9)
Q1_Q21: IC33.D27 IC42.F2 | length 48.4
  Top Layer w0.175: IC33.D27@95.5,-8.5 v1(96,-9) ; IC42.F2@127.75,-5.4 v1(128.25,-5.9)
  Mid-Layer 3 w0.109: v1(96,-9) 96.43,-9.43 97.037,-9.43 97.571,-9.963 97.571,-11.178 98.093,-11.7 98.6,-11.7 98.9,-12 99.6,-12 100.018,-12.418 100.868,-12.418 101.25,-12.8 101.7,-12.8 102.65,-13.75 113.6,-13.75 113.8,-13.55 113.8,-13.15 114,-12.95 114.4,-12.95 114.6,-13.15 114.6,-13.25 114.9,-13.55 116.1,-13.55 116.209,-13.441 116.209,-13.295 115.921,-13.006 115.921,-12.86 116.139,-12.642 116.285,-12.642 117.069,-13.425 117.215,-13.425 117.433,-13.207 117.433,-13.061 116.649,-12.277 116.649,-12.131 116.868,-11.913 117.014,-11.913 117.702,-12.6 117.847,-12.6 118.066,-12.382 118.066,-12.236 117.394,-11.564 117.394,-11.418 117.612,-11.199 117.758,-11.199 118.032,-11.473 118.177,-11.473 118.295,-11.355 118.438,-11.355 118.704,-11.088 118.704,-10.946 119.2,-10.45 119.355,-10.45 119.458,-10.347 120.553,-10.347 121.178,-9.722 121.82,-9.722 122.072,-9.471 122.279,-9.471 122.3,-9.45 122.75,-9.45 122.859,-9.341 122.859,-9.195 122.719,-9.055 122.719,-8.909 122.938,-8.69 123.083,-8.69 123.456,-9.063 123.602,-9.063 123.821,-8.844 123.821,-8.698 123.734,-8.612 123.734,-8.466 123.953,-8.247 124.098,-8.247 124.321,-8.47 124.467,-8.47 124.686,-8.252 124.686,-8.106 124.4,-7.82 124.4,-7.65 124.7,-7.35 127.5,-7.35 127.7,-7.15 127.7,-6.45 v1(128.25,-5.9)
Q1_Q22: IC33.B26 IC42.G3 | length 48.3
  Top Layer w0.175: IC33.B26@97.5,-7.5 v1(98,-8) ; IC42.G3@126.75,-4.4 v1(127.3,-4.95)
  Mid-Layer 3 w0.109: v1(98,-8) 98.684,-8.684 99.509,-8.684 99.643,-8.55 101.97,-8.55 102.073,-8.653 102.073,-8.947 102.176,-9.05 102.485,-9.05 102.588,-8.947 102.588,-8.653 102.692,-8.55 105.3,-8.55 105.45,-8.4 105.747,-8.4 106.797,-7.35 107.25,-7.35 107.359,-7.241 107.359,-7.095 107.278,-7.014 107.278,-6.868 107.497,-6.65 107.643,-6.65 108.007,-7.013 108.152,-7.013 108.371,-6.795 108.371,-6.649 108.007,-6.285 108.007,-6.139 108.226,-5.921 108.372,-5.921 108.453,-6.002 108.598,-6.002 108.7,-5.9 109.405,-5.9 109.508,-5.797 109.508,-5.703 109.611,-5.6 109.92,-5.6 110.023,-5.703 110.023,-6.097 110.126,-6.2 110.435,-6.2 110.538,-6.097 110.538,-5.703 110.642,-5.6 110.951,-5.6 111.054,-5.703 111.054,-6.097 111.157,-6.2 111.466,-6.2 111.569,-6.097 111.569,-5.703 111.672,-5.6 111.982,-5.6 112.085,-5.703 112.085,-6.097 112.188,-6.2 112.497,-6.2 112.6,-6.097 112.6,-5.703 112.703,-5.6 113.012,-5.6 113.115,-5.703 113.115,-6.097 113.219,-6.2 113.528,-6.2 113.631,-6.097 113.631,-6.003 113.734,-5.9 113.85,-5.9 114.85,-4.9 115.5,-4.9 116,-4.4 116.558,-4.4 116.662,-4.297 116.662,-4.077 116.765,-3.974 117.074,-3.974 117.177,-4.077 117.177,-4.997 117.28,-5.1 117.589,-5.1 117.692,-4.997 117.692,-4.503 117.795,-4.4 118.381,-4.4 118.485,-4.503 118.485,-4.527 118.588,-4.63 118.897,-4.63 119,-4.527 119,-4.503 119.103,-4.4 122.805,-4.4 122.908,-4.297 122.908,-3.737 123.011,-3.634 123.32,-3.634 123.423,-3.737 123.423,-5.097 123.526,-5.2 123.835,-5.2 123.938,-5.097 123.938,-3.737 124.042,-3.634 124.351,-3.634 124.454,-3.737 124.454,-4.573 124.557,-4.676 124.866,-4.676 124.969,-4.573 124.969,-4.503 125.072,-4.4 125.382,-4.4 125.485,-4.503 125.485,-4.527 125.588,-4.63 125.897,-4.63 126,-4.527 126,-4.503 126.103,-4.4 126.357,-4.4 126.75,-4.007 126.75,-3.75 127.029,-3.471 127.428,-3.471 127.7,-3.743 127.7,-4.55 v1(127.3,-4.95)
Q1_Q23: IC33.B25 IC42.K3 | length 42.8
  Top Layer w0.175: IC33.B25@97.5,-6.5 v1(98,-7) ; IC42.K3@126.75,-1.4 v1(127.25,-0.9)
  Mid-Layer 3 w0.109: v1(98,-7) 98.43,-7.43 100.205,-7.43 100.308,-7.326 100.308,-7.133 100.411,-7.03 100.72,-7.03 100.823,-7.133 100.823,-7.663 100.926,-7.766 101.235,-7.766 101.338,-7.663 101.338,-7.137 101.442,-7.034 101.751,-7.034 101.854,-7.137 101.854,-7.704 101.9,-7.75 102.269,-7.75 102.369,-7.65 102.369,-7.431 102.85,-6.95 103.75,-6.95 104.559,-6.141 104.559,-5.995 104.537,-5.973 104.537,-5.827 104.756,-5.608 104.901,-5.608 105.207,-5.913 105.352,-5.913 105.571,-5.695 105.571,-5.549 105.151,-5.129 105.151,-4.983 105.37,-4.765 105.516,-4.765 105.935,-5.184 106.081,-5.184 106.3,-4.966 106.3,-4.82 105.972,-4.492 105.972,-4.347 106.191,-4.128 106.337,-4.128 106.664,-4.456 106.81,-4.456 107.029,-4.237 107.029,-4.091 106.892,-3.954 106.892,-3.808 107.35,-3.35 107.5,-3.35 107.95,-2.9 108.67,-2.9 108.773,-3.003 108.773,-3.197 108.876,-3.3 109.185,-3.3 109.288,-3.197 109.288,-2.689 109.392,-2.586 109.701,-2.586 109.804,-2.689 109.804,-3.197 109.907,-3.3 110.216,-3.3 110.319,-3.197 110.319,-3.003 110.422,-2.9 110.732,-2.9 110.835,-3.003 110.835,-3.197 110.938,-3.3 111.247,-3.3 111.35,-3.197 111.35,-3.003 111.453,-2.9 111.762,-2.9 111.865,-3.003 111.865,-3.197 111.969,-3.3 112.278,-3.3 112.381,-3.197 112.381,-2.969 112.6,-2.75 113.77,-2.75 113.873,-2.853 113.873,-3 113.976,-3.103 114.285,-3.103 114.388,-3 114.388,-2.853 114.492,-2.75 121.007,-2.75 121.679,-2.078 121.679,-1.863 122.143,-1.4 126.75,-1.4 v1(127.25,-0.9)
Q1_Q24: IC33.B18 IC42.L2 | length 48.2
  Top Layer w0.175: IC33.B18@97.5,0.5 v1(98,0) ; IC42.L2@127.75,-0.4 v1(128.25,0.1)
  Mid-Layer 3 w0.109: v1(98,0) 98.605,0 98.708,0.103 98.708,0.197 98.811,0.3 99.12,0.3 99.223,0.197 99.223,-0.197 99.326,-0.3 99.635,-0.3 99.738,-0.197 99.738,-0.103 99.842,0 100.05,0 100.159,0.109 100.159,0.255 100.093,0.321 100.093,0.467 100.312,0.686 100.457,0.686 100.524,0.62 100.67,0.62 103.75,3.7 104.4,3.7 104.585,3.515 104.585,3.396 104.688,3.292 104.997,3.292 105.1,3.396 105.1,3.947 105.203,4.05 105.512,4.05 105.615,3.947 105.615,3.653 105.718,3.55 106.028,3.55 106.131,3.653 106.131,3.947 106.234,4.05 106.543,4.05 106.646,3.947 106.646,3.653 106.749,3.55 107.058,3.55 107.162,3.653 107.162,3.947 107.265,4.05 107.574,4.05 107.677,3.947 107.677,3.653 107.78,3.55 109.2,3.55 109.5,3.85 109.655,3.85 109.758,3.953 109.758,4.047 109.861,4.15 110.17,4.15 110.273,4.047 110.273,3.677 110.376,3.574 110.685,3.574 110.788,3.677 110.788,4.047 110.892,4.15 111.201,4.15 111.304,4.047 111.304,3.677 111.407,3.574 111.716,3.574 111.819,3.677 111.819,4.047 111.922,4.15 112.232,4.15 112.335,4.047 112.335,3.677 112.438,3.574 112.747,3.574 112.85,3.677 112.85,4.047 112.953,4.15 113.262,4.15 113.365,4.047 113.365,3.677 113.469,3.574 113.778,3.574 113.881,3.677 113.881,3.747 113.984,3.85 115.95,3.85 117.25,2.55 117.408,2.55 117.512,2.653 117.512,2.716 117.615,2.819 117.924,2.819 118.027,2.716 118.027,2.653 118.13,2.55 119.357,2.55 119.679,2.228 119.679,1.821 119.88,1.62 123.666,1.62 123.769,1.724 123.769,2.817 123.872,2.92 124.182,2.92 124.285,2.817 124.285,0.424 124.388,0.32 124.697,0.32 124.8,0.424 124.8,1.517 124.903,1.62 126.48,1.62 126.821,1.279 ; 126.82,1.278 126.82,0.83 126.979,0.671 127.428,0.671 ; 127.429,0.671 127.529,0.671 127.679,0.521 127.679,0.22 127.8,0.1 v1(128.25,0.1)
Q1_Q25: IC33.K21 IC42.N3 | length 48.2
  Top Layer w0.175: IC33.K21@89.5,-2.5 v1(90,-3) ; IC42.N3@126.75,1.6 127.25,2.1 v1(127.3,2.05)
  Mid-Layer 3 w0.109: v1(90,-3) 90.571,-2.43 90.571,-1.822 90.822,-1.571 91.037,-1.571 91.546,-1.062 91.546,0.696 92.4,1.55 93.157,1.55 93.571,1.963 93.571,2.178 93.963,2.571 95.178,2.571 95.571,2.963 95.571,3.178 95.822,3.43 96.037,3.43 96.571,3.963 96.571,4.178 96.963,4.571 98.371,4.571 98.95,5.15 99.75,5.15 101.3,6.7 102.261,6.7 102.461,6.9 102.77,6.9 102.873,6.797 102.873,6.603 102.976,6.5 103.285,6.5 103.388,6.603 103.388,6.797 103.492,6.9 103.801,6.9 103.904,6.797 103.904,6.603 104.007,6.5 104.316,6.5 104.419,6.603 104.419,6.619 104.439,6.6 117.75,6.6 119.4,4.95 124.55,4.95 124.814,4.686 125.097,4.686 125.315,4.468 125.315,4.322 125.178,4.185 125.178,4.039 125.397,3.82 125.543,3.82 125.68,3.82 125.97,3.53 126.428,3.53 126.82,3.137 126.82,2.53 v1(127.3,2.05)
Q1_Q26: IC33.L21 IC42.P3 | length 48.2
  Top Layer w0.175: IC33.L21@88.5,-2.5 v1(89,-3) ; IC42.P3@126.75,2.6 v1(127.25,3.1)
  Mid-Layer 3 w0.109: v1(89,-3) 89.571,-2.43 89.571,-1.822 89.963,-1.429 90.178,-1.429 90.571,-1.037 90.571,0.921 91.543,1.893 91.543,2.15 91.893,2.5 93.107,2.5 93.571,2.963 93.571,3.178 93.963,3.571 95.178,3.571 95.571,3.963 95.571,4.178 96.543,5.15 97.25,5.15 97.53,5.43 99.18,5.43 100.684,6.934 101.434,6.934 101.634,7.134 103.898,7.134 104.098,6.934 104.758,6.934 104.858,7.034 105.173,7.034 105.273,6.934 105.788,6.934 105.888,7.034 106.204,7.034 106.304,6.934 106.819,6.934 106.919,7.034 107.235,7.034 107.335,6.934 107.934,6.934 108,7 108.08,7 108.214,7.134 108.717,7.134 108.851,7 109.288,7 109.388,7.1 109.704,7.1 109.804,7 110.319,7 110.419,7.1 110.735,7.1 110.835,7 111.35,7 111.45,7.1 111.765,7.1 111.865,7 112.381,7 112.481,7.1 112.796,7.1 112.896,7 117.8,7 119.5,5.3 125.1,5.3 127.25,3.15 v1(127.25,3.1)
Q1_Q27: IC33.F28 IC42.B1 | length 48.3
  Top Layer w0.175: IC33.F28@93.5,-9.5 v1(94,-10) ; IC42.B1@128.75,-9.4 v1(129.25,-9.9)
  Mid-Layer 3 w0.109: v1(94,-10) 93.571,-10.43 93.571,-11.178 93.963,-11.571 94.178,-11.571 94.571,-11.963 94.571,-12.178 95.963,-13.571 96.178,-13.571 96.571,-13.963 96.571,-14.178 96.893,-14.5 98.3,-14.5 98.5,-14.7 98.5,-15.107 98.893,-15.5 100.25,-15.5 101.55,-16.8 102.061,-16.8 102.261,-16.6 102.57,-16.6 102.673,-16.703 102.673,-16.897 102.776,-17 103.085,-17 103.188,-16.897 103.188,-16.703 103.292,-16.6 103.601,-16.6 103.704,-16.703 103.704,-16.897 103.807,-17 104.116,-17 104.316,-16.8 104.638,-16.8 104.838,-17 105.147,-17 105.347,-16.8 105.669,-16.8 105.869,-17 106.178,-17 106.378,-16.8 106.699,-16.8 106.899,-17 107.209,-17 107.409,-16.8 107.73,-16.8 107.93,-17 108.239,-17 108.439,-16.8 108.761,-16.8 108.961,-17 109.27,-17 109.47,-16.8 109.792,-16.8 109.992,-17 110.301,-17 110.501,-16.8 110.823,-16.8 111.023,-17 111.332,-17 111.532,-16.8 111.853,-16.8 112.053,-17 112.363,-17 112.563,-16.8 112.95,-16.8 113.2,-17.05 120.05,-17.05 122.2,-14.9 126.25,-14.9 127.089,-14.061 127.089,-13.778 127.307,-13.56 127.453,-13.56 127.59,-13.697 127.736,-13.697 127.955,-13.478 127.955,-13.332 127.955,-13.195 129.25,-11.9 v1(129.25,-9.9)
Q1_Q28: IC33.G28 IC42.C2 | length 48.2
  Top Layer w0.175: IC33.G28@92.5,-9.5 v1(93,-10) ; IC42.C2@127.75,-8.4 v1(128.25,-8.9)
  MidLayer1 w0.109: v1(93,-10) 93.571,-10.571 93.571,-11.178 93.963,-11.571 94.178,-11.571 94.571,-11.963 94.571,-12.178 95.893,-13.5 118.257,-13.5 118.759,-12.998 118.759,-12.824 118.58,-12.645 118.58,-12.471 118.841,-12.209 119.015,-12.209 119.281,-12.476 119.548,-12.742 119.722,-12.742 119.983,-12.481 119.983,-12.307 119.717,-12.041 119.479,-11.803 119.479,-11.629 119.74,-11.368 119.914,-11.368 120.152,-11.606 120.418,-11.872 120.592,-11.872 120.853,-11.611 120.853,-11.437 120.674,-11.258 120.674,-11.083 120.82,-10.937 120.82,-10.722 121.193,-10.35 121.993,-10.35 122.116,-10.473 122.116,-10.727 122.239,-10.85 122.608,-10.85 122.731,-10.727 122.731,-9.973 122.854,-9.85 123.223,-9.85 123.346,-9.973 123.346,-10.727 123.47,-10.85 123.839,-10.85 123.962,-10.727 123.962,-9.973 124.085,-9.85 124.454,-9.85 124.577,-9.973 124.577,-10.227 124.7,-10.35 125.685,-10.35 125.808,-10.473 125.808,-10.727 125.931,-10.85 126.3,-10.85 126.423,-10.727 126.423,-10.473 126.547,-10.35 127.407,-10.35 127.821,-9.937 127.821,-9.329 v1(128.25,-8.9)
Q1_Q29: IC33.E26 IC42.E1 | length 49
  Top Layer w0.175: IC33.E26@94.5,-7.5 v1(95,-8) ; IC42.E1@128.75,-6.4 v1(129.25,-6.9)
  Mid-Layer 3 w0.109: v1(95,-8) 95.45,-8.45 95.45,-11.057 96.043,-11.65 96.319,-11.65 97.669,-13 99,-13 99.884,-13.884 100.334,-13.884 101.328,-14.878 101.328,-15.161 101.547,-15.38 101.83,-15.38 102.3,-15.85 102.461,-15.85 102.661,-16.05 102.97,-16.05 103.17,-15.85 103.492,-15.85 103.692,-16.05 104.001,-16.05 104.201,-15.85 104.522,-15.85 104.722,-16.05 105.032,-16.05 105.232,-15.85 105.553,-15.85 105.753,-16.05 106.062,-16.05 106.165,-15.947 106.165,-15.753 106.269,-15.65 106.578,-15.65 106.681,-15.753 106.681,-15.947 106.784,-16.05 107.093,-16.05 107.293,-15.85 107.615,-15.85 107.815,-16.05 108.124,-16.05 108.324,-15.85 108.646,-15.85 108.846,-16.05 109.155,-16.05 109.355,-15.85 109.676,-15.85 109.876,-16.05 110.186,-16.05 110.289,-15.947 110.289,-15.753 110.392,-15.65 110.701,-15.65 110.804,-15.753 110.804,-15.947 110.907,-16.05 111.216,-16.05 111.416,-15.85 111.761,-15.85 111.961,-15.65 112.27,-15.65 112.373,-15.753 112.373,-15.947 112.476,-16.05 112.785,-16.05 112.985,-15.85 113.65,-15.85 114.1,-16.3 118.75,-16.3 121.25,-13.8 124.85,-13.8 127.75,-10.9 127.75,-8.793 128.213,-8.33 128.428,-8.33 128.7,-8.057 128.7,-7.45 v1(129.25,-6.9)
Q1_Q30: IC33.D29 IC42.F1 | length 48.2
  Top Layer w0.175: IC33.D29@95.5,-10.5 v1(96,-11) ; IC42.F1@128.75,-5.4 v1(129.25,-5.9)
  Mid-Layer 3 w0.109: v1(96,-11) 97.702,-12.702 99.152,-12.702 100.1,-13.65 100.7,-13.65 101.2,-14.15 101.2,-14.35 101.9,-15.05 102.3,-15.05 102.718,-15.468 105.882,-15.468 106.15,-15.2 107.32,-15.2 107.423,-15.303 107.423,-15.397 107.526,-15.5 107.835,-15.5 107.938,-15.397 107.938,-15.303 108.042,-15.2 108.351,-15.2 108.454,-15.303 108.454,-15.397 108.557,-15.5 108.866,-15.5 108.969,-15.397 108.969,-15.303 109.072,-15.2 109.382,-15.2 109.485,-15.303 109.485,-15.397 109.588,-15.5 109.897,-15.5 110,-15.397 110,-15.303 110.103,-15.2 111.48,-15.2 111.68,-15.4 111.989,-15.4 112.189,-15.2 112.7,-15.2 112.968,-15.468 113.918,-15.468 114.4,-15.95 115.055,-15.95 115.405,-15.6 116.9,-15.6 117,-15.7 118.3,-15.7 118.559,-15.441 118.559,-15.295 118.546,-15.281 118.546,-15.135 118.764,-14.917 118.91,-14.917 119.207,-15.213 119.352,-15.213 119.571,-14.995 119.571,-14.849 119.274,-14.552 119.274,-14.406 119.493,-14.188 119.639,-14.188 119.935,-14.484 120.081,-14.484 120.3,-14.266 120.3,-14.12 120.003,-13.823 120.003,-13.678 120.222,-13.459 120.368,-13.459 120.664,-13.756 120.81,-13.756 121.029,-13.537 121.029,-13.391 120.892,-13.254 120.892,-12.908 121.1,-12.7 121.57,-12.7 121.673,-12.803 121.673,-13.397 121.776,-13.5 122.085,-13.5 122.188,-13.397 122.188,-13.203 122.292,-13.1 124.05,-13.1 124.596,-12.554 124.788,-12.554 125.054,-12.288 125.054,-12.096 125.65,-11.5 125.65,-11.4 126.7,-10.35 126.7,-8.843 127.072,-8.471 127.287,-8.471 127.821,-7.937 127.821,-7.722 128.213,-7.33 128.428,-7.33 128.68,-7.078 128.68,-6.62 129.25,-6.05 v1(129.25,-5.9)
Q1_Q31: IC33.C25 IC42.J2 | length 48.4
  Top Layer w0.175: IC33.C25@96.5,-6.5 v1(97,-7) ; IC42.J2@127.75,-2.4 v1(128.25,-1.9)
  Mid-Layer 3 w0.109: v1(97,-7) 97.45,-7.45 98.057,-7.45 98.571,-7.963 98.571,-8.178 98.822,-8.43 99.33,-8.43 99.509,-8.25 105,-8.25 105.809,-7.441 105.809,-7.295 105.751,-7.236 105.751,-7.09 105.969,-6.872 106.115,-6.872 106.247,-7.003 106.457,-7.213 106.602,-7.213 106.821,-6.995 106.821,-6.849 106.611,-6.639 106.479,-6.507 106.479,-6.361 106.698,-6.143 106.844,-6.143 106.976,-6.274 107.185,-6.484 107.331,-6.484 107.55,-6.266 107.55,-6.12 107.208,-5.778 107.208,-5.633 107.427,-5.414 107.573,-5.414 107.914,-5.756 108.06,-5.756 108.279,-5.537 108.279,-5.391 108.142,-5.254 108.142,-5.108 108.35,-4.9 108.505,-4.9 108.608,-4.797 108.608,-4.678 108.711,-4.575 109.02,-4.575 109.123,-4.678 109.123,-5.197 109.226,-5.3 109.535,-5.3 109.638,-5.197 109.638,-4.678 109.742,-4.575 110.051,-4.575 110.154,-4.678 110.154,-5.197 110.257,-5.3 110.566,-5.3 110.669,-5.197 110.669,-4.678 110.772,-4.575 111.082,-4.575 111.185,-4.678 111.185,-5.197 111.288,-5.3 111.597,-5.3 111.7,-5.197 111.7,-4.678 111.803,-4.575 112.112,-4.575 112.215,-4.678 112.215,-5.197 112.319,-5.3 112.628,-5.3 112.731,-5.197 112.731,-4.678 112.834,-4.575 113.143,-4.575 113.246,-4.678 113.246,-5.197 113.349,-5.3 113.659,-5.3 113.762,-5.197 113.762,-5.003 113.865,-4.9 114.15,-4.9 114.259,-4.791 114.259,-4.645 114.122,-4.508 114.122,-4.362 114.341,-4.143 114.487,-4.143 114.697,-4.353 114.907,-4.563 115.052,-4.563 115.271,-4.345 115.271,-4.199 115.061,-3.989 114.851,-3.779 114.851,-3.633 115.07,-3.415 115.216,-3.415 115.376,-3.575 115.475,-3.575 115.65,-3.4 116.093,-3.4 116.196,-3.503 116.196,-3.697 116.299,-3.8 116.608,-3.8 116.712,-3.697 116.712,-3.503 116.815,-3.4 117.124,-3.4 117.227,-3.503 117.227,-3.697 117.33,-3.8 117.639,-3.8 117.742,-3.697 117.742,-3.503 117.845,-3.4 126.1,-3.4 126.65,-2.85 127.1,-2.85 128.05,-1.9 v1(128.25,-1.9)